# EAGLE board FlightPCB (EAGLE 9.6.2)
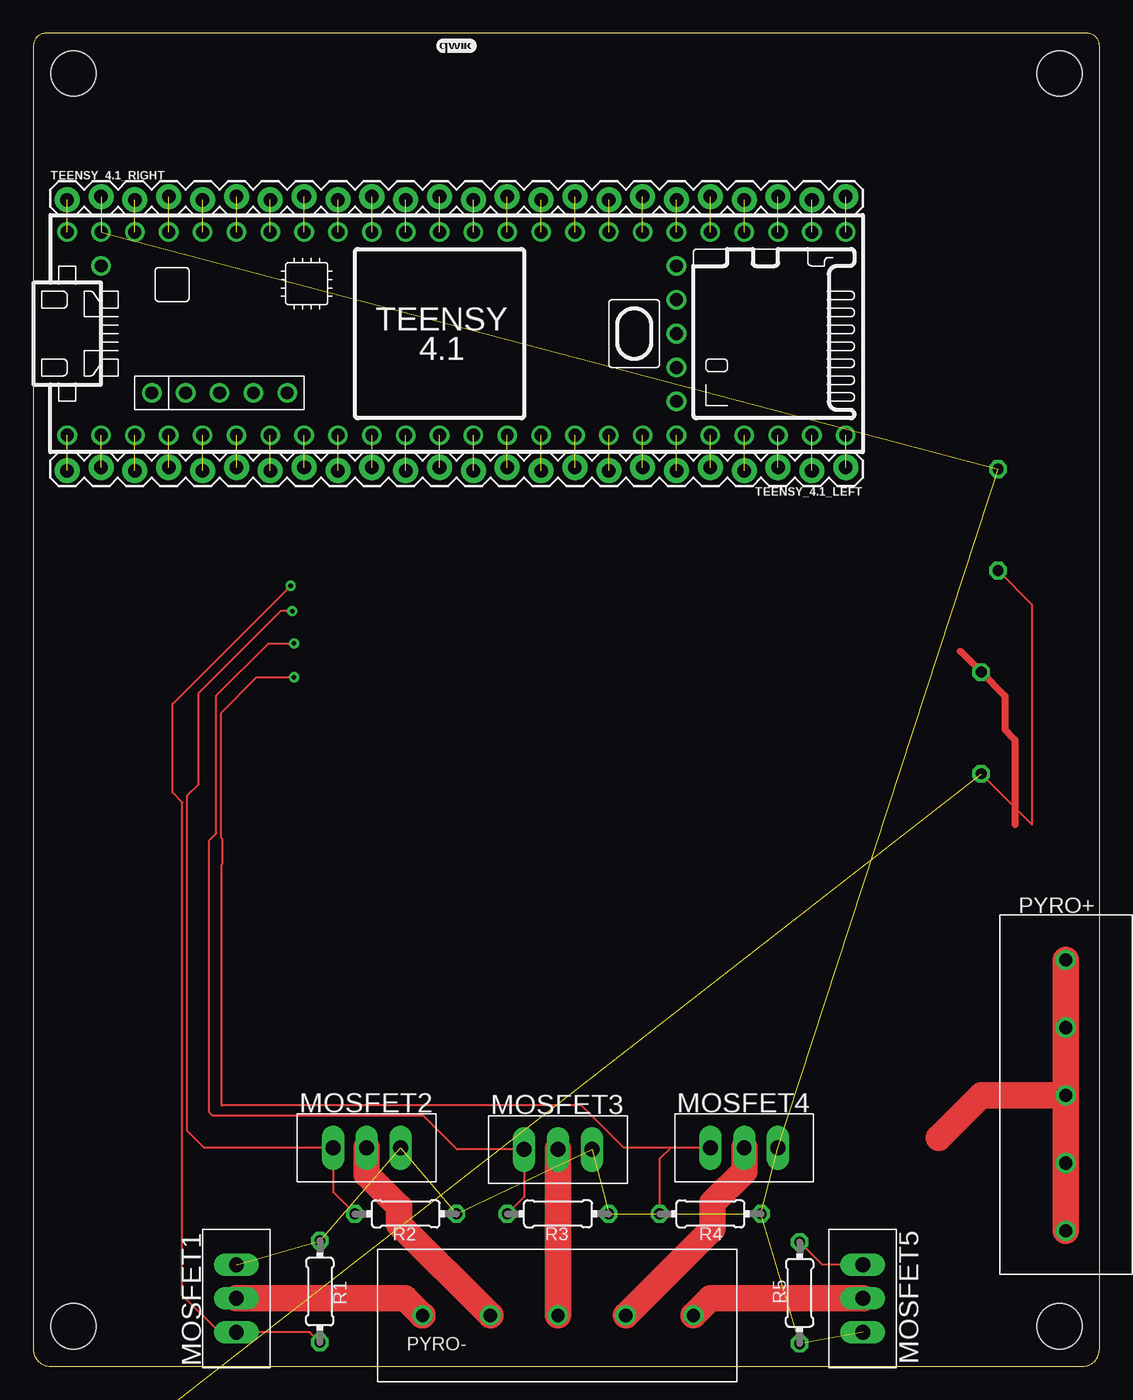
[diagram p0: board, top side]
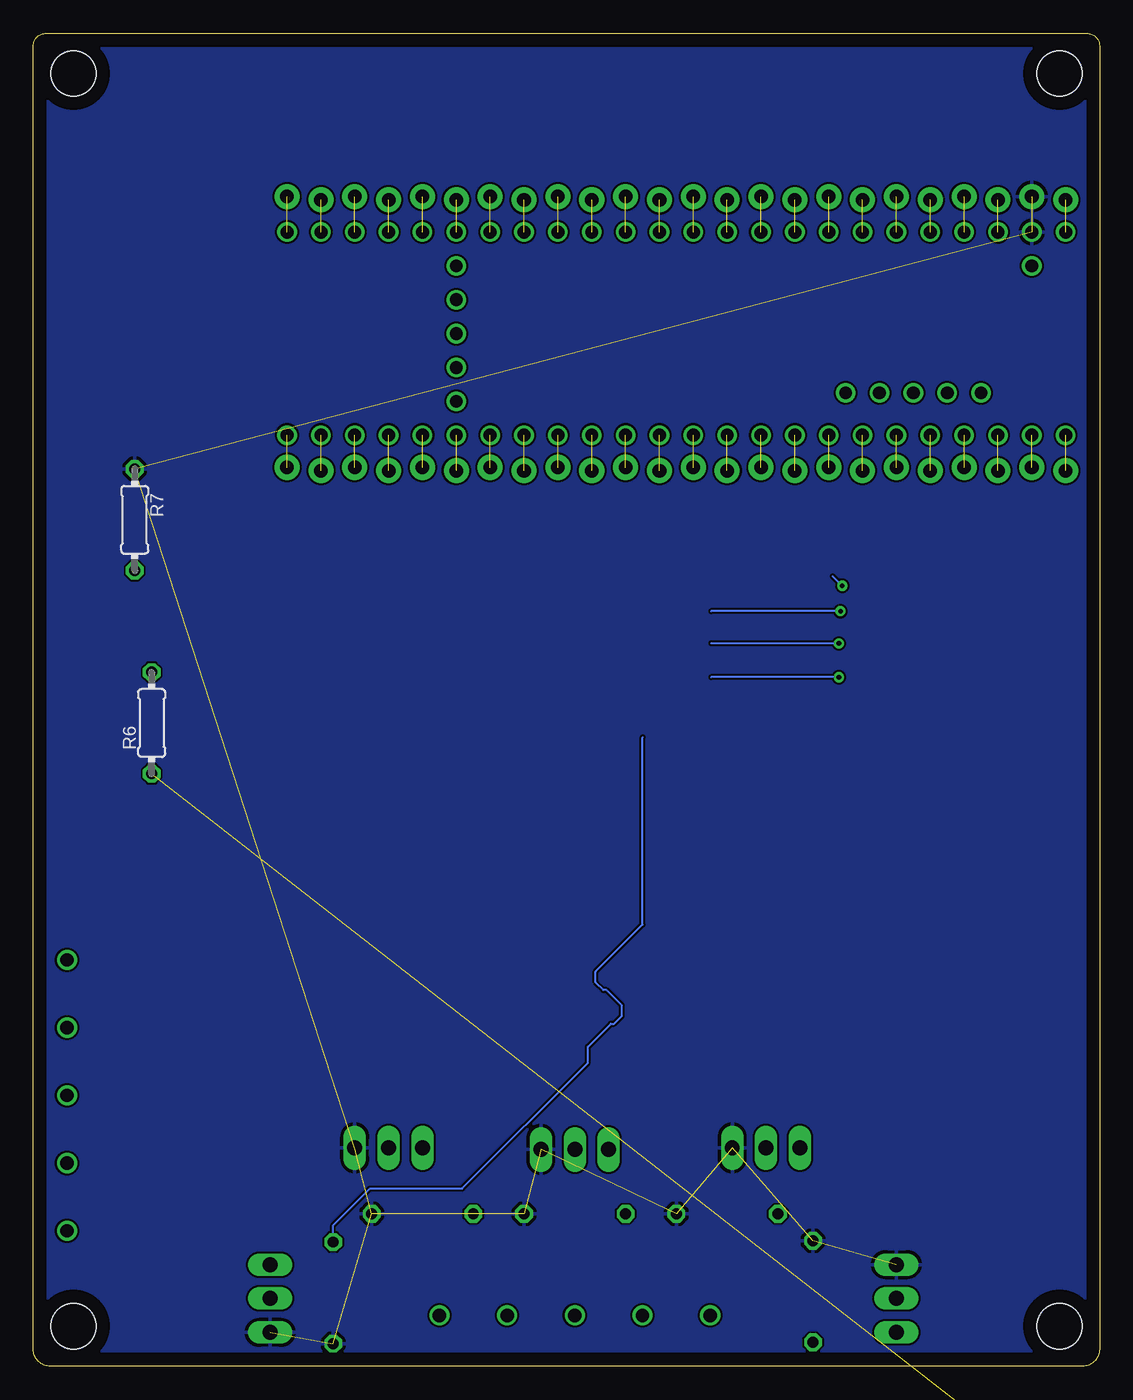
[diagram p1: board, bottom side, seen from below]

Size 80 x 100 mm. Coordinates in mm from the lower left corner, seen from the top.
Outline: 79.06,100 0.94,100 arc90 0,99.06 0,1.27 arc90 1.27,0 78.74,0 arc90 80,1.26 80,99.06 arc90 79.06,100
Copper layers (1+2*15+16): Top 0.035mm / dielectric 0.2mm / Route2 0.0175mm / dielectric 1.065mm / Route15 0.0175mm / dielectric 0.2mm / Bottom 0.035mm
Design rules "default *": minimum track width 6mil, minimum drill 0.35mm, track to track 6mil, track to pad 6mil, pad to pad 6mil, via to via 6mil, smd to smd 6mil, copper to edge 40mil, drill to drill 6mil, minimum pad ring 10mil, minimum via ring 8mil, stop-mask expansion 4mil, vias tented up to drill 0mil, thermal gap 10mil
Net classes: 1 Power Delivery: width 0.25 mm
Holes 3.4 mm at 3,97 3,3 77,97 77,3

## Footprints (pad centres in the part's own frame; a part is rotated, then mirrored left to right if it is on the bottom)
TO220BH_SIMPLE = drill 1.118 long: D 0,-6.35; G -2.54,-6.35; S 2.54,-6.35
TERMINAL_BLOCK_5_PIN_5MM = drill 1: P1 0,0; P2 0,-5.08; P3 0,-10.16; P4 0,-15.24; P5 0,-20.32
0204/7 = drill 0.813 octagon: 1 -3.81,0; 2 3.81,0
TEENSY_4.1 = drill 0.965: 0/RX1/CS1/CRX2* -25.4,-7.62; 1/TX1/MISO1/CTX2* -22.86,-7.62; 2* -20.32,-7.62; 3* -17.78,-7.62; 3V3 7.62,-7.62; 3V3_2 17.78,-2.54; 3V3_250MA -22.86,7.62; 4* -15.24,-7.62; 5* -12.7,-7.62; 6* -10.16,-7.62; 7/RX2* -7.62,-7.62; 8/TX2* -5.08,-7.62; 9* -2.54,-7.62; 10/CS* 0,-7.62; 11/MOSI/CTX1* 2.54,-7.62; 12/MISO* 5.08,-7.62; 13/LED/SCK* 5.08,7.62; 14/A0/TX3* 2.54,7.62; 15/A1/RX3* 0,7.62; 16/A2/RX4/SCL1 -2.54,7.62; 17/A3/TX4/SDA1 -5.08,7.62; 18/A4/SDA* -7.62,7.62; 19/A5/SCL* -10.16,7.62; 20/A6/TX5 -12.7,7.62; 21/A7/RX5 -15.24,7.62; 22/A8/CTX1* -17.78,7.62; 23/A9/CRX1* -20.32,7.62; 24/A10/TX6/SCL2* 10.16,-7.62; 25/A11/RX6/SDA2* 12.7,-7.62; 26/A12/MOSI1 15.24,-7.62; 27/A13/SCK1 17.78,-7.62; 28/RX7* 20.32,-7.62; 29/TX7* 22.86,-7.62; 30/CRX3 25.4,-7.62; 31/CTX3 27.94,-7.62; 32 30.48,-7.62; 33* 30.48,7.62; 34/RX8 27.94,7.62; 35/TX8 25.4,7.62; 36/CS* 22.86,7.62; 37/CS* 20.32,7.62; 38/A14/CS1 17.78,7.62; 39/A15/MISO1 15.24,7.62; 40/A16 12.7,7.62; 41/A17 10.16,7.62; GND -27.94,-7.62; GND2 7.62,7.62; GND3 17.78,0; GND4 -25.4,7.62; PROG 17.78,2.54; RESET 17.78,5.08; U5V -21.59,-4.445; UD+ -16.51,-4.445; UD- -19.05,-4.445; UGND1 -13.97,-4.445; UGND2 -11.43,-4.445; VBAT 17.78,-5.08; VIN -27.94,7.62; VUSB -25.4,5.08
1X24_LOCK = drill 1.016 pad 1.88: 1 -26.67,-0.127; 2 -24.13,0.127; 3 -21.59,-0.127; 4 -19.05,0.127; 5 -16.51,-0.127; 6 -13.97,0.127; 7 -11.43,-0.127; 8 -8.89,0.127; 9 -6.35,-0.127; 10 -3.81,0.127; 11 -1.27,-0.127; 12 1.27,0.127; 13 3.81,-0.127; 14 6.35,0.127; 15 8.89,-0.127; 16 11.43,0.127; 17 13.97,-0.127; 18 16.51,0.127; 19 19.05,-0.127; 20 21.59,0.127; 21 24.13,-0.127; 22 26.67,0.127; 23 29.21,-0.127; 24 31.75,0.127

## Placement (x,y rotation side)
LOGO1  QWIIC_LOGO_3MM  [QWIIC_3MM]  31.75,99.06 0 top
MOSFET1  IRLZ44Z  [TO220BH_SIMPLE]  8.89,5.08 90 top
MOSFET2  IRLZ44Z  [TO220BH_SIMPLE]  25.02,22.73 0 top
MOSFET3  IRLZ44Z  [TO220BH_SIMPLE]  39.37,22.61 0 top
MOSFET4  IRLZ44Z  [TO220BH_SIMPLE]  53.34,22.73 0 top
MOSFET5  IRLZ44Z  [TO220BH_SIMPLE]  68.58,5.08 270 top
PYRO+  [TERMINAL_BLOCK_5_PIN_5MM]  77.47,30.48 0 top
PYRO-  [TERMINAL_BLOCK_5_PIN_5MM]  29.21,3.81 90 top
R1  10k  [0204/7]  21.5,5.6 90 top
R2  10k  [0204/7]  27.94,11.43 0 top
R3  10k  [0204/7]  39.37,11.43 0 top
R4  10k  [0204/7]  50.8,11.43 0 top
R5  10k  [0204/7]  57.5,5.5 270 top
R6  10k  [0204/7]  71.12,48.26 90 bottom
R7  1k  [0204/7]  72.39,63.5 270 bottom
R8  10k  [0204/7]  3.81,-5.08 0 top  (outside the outline)
TEENSY_4.1  TEENSY_4.1  [TEENSY_4.1]  30.48,77.47 0 top
TEENSY_4.1_LEFT  [1X24_LOCK]  34.29,67.31 180 top
TEENSY_4.1_RIGHT  [1X24_LOCK]  29.21,87.63 0 top

## Library data of the parts
LOGO1 = SparkFun-Aesthetics
MOSFET1-MOSFET5 = transistor-power_MOD
PYRO+ PYRO- = MattMtzLPRD
R1-R8 = rcl; SPICEPREFIX: R
TEENSY_4.1 = Teensy4-1
TEENSY_4.1_LEFT TEENSY_4.1_RIGHT = MODIFIED-SparkFun-Connectors

## Nets
+3V3 [Power Delivery]: TEENSY_4.1.3V3 TEENSY_4.1_LEFT.10
+5V: TEENSY_4.1.VIN TEENSY_4.1_RIGHT.1
BATT1_READ_V: R8.1
BATT1_VCC [Power Delivery]: R6.2
CH1: MOSFET1.D PYRO-.P1
CH2: MOSFET2.D PYRO-.P2
CH3: MOSFET3.D PYRO-.P3
CH4: MOSFET4.D PYRO-.P4
CH5: MOSFET5.D PYRO-.P5
GND [Power Delivery]: MOSFET1.S MOSFET2.S MOSFET3.S MOSFET4.S MOSFET5.S R1.2 R2.2 R3.2 R4.2 R5.2 R7.1 TEENSY_4.1.GND4 TEENSY_4.1_RIGHT.2
N$1: TEENSY_4.1.GND TEENSY_4.1_LEFT.24
N$2: TEENSY_4.1.0/RX1/CS1/CRX2* TEENSY_4.1_LEFT.23
N$3: TEENSY_4.1.1/TX1/MISO1/CTX2* TEENSY_4.1_LEFT.22
N$4: R6.1 R7.2 R8.2
N$5: TEENSY_4.1.2* TEENSY_4.1_LEFT.21
N$6: TEENSY_4.1.3* TEENSY_4.1_LEFT.20
N$7: TEENSY_4.1.4* TEENSY_4.1_LEFT.19
N$8: TEENSY_4.1.5* TEENSY_4.1_LEFT.18
N$9: TEENSY_4.1.6* TEENSY_4.1_LEFT.17
N$10: TEENSY_4.1.7/RX2* TEENSY_4.1_LEFT.16
N$11: TEENSY_4.1.8/TX2* TEENSY_4.1_LEFT.15
N$12: TEENSY_4.1.9* TEENSY_4.1_LEFT.14
N$13: TEENSY_4.1.10/CS* TEENSY_4.1_LEFT.13
N$14: TEENSY_4.1.11/MOSI/CTX1* TEENSY_4.1_LEFT.12
N$15: TEENSY_4.1.12/MISO* TEENSY_4.1_LEFT.11
N$17: TEENSY_4.1.24/A10/TX6/SCL2* TEENSY_4.1_LEFT.9
N$18: TEENSY_4.1.25/A11/RX6/SDA2* TEENSY_4.1_LEFT.8
N$19: TEENSY_4.1.26/A12/MOSI1 TEENSY_4.1_LEFT.7
N$20: TEENSY_4.1.27/A13/SCK1 TEENSY_4.1_LEFT.6
N$21: TEENSY_4.1.28/RX7* TEENSY_4.1_LEFT.5
N$22: TEENSY_4.1.29/TX7* TEENSY_4.1_LEFT.4
N$23: TEENSY_4.1.30/CRX3 TEENSY_4.1_LEFT.3
N$24: TEENSY_4.1.31/CTX3 TEENSY_4.1_LEFT.2
N$25: TEENSY_4.1.32 TEENSY_4.1_LEFT.1
N$26: TEENSY_4.1.33* TEENSY_4.1_RIGHT.24
N$27: TEENSY_4.1.34/RX8 TEENSY_4.1_RIGHT.23
N$28: TEENSY_4.1.35/TX8 TEENSY_4.1_RIGHT.22
N$29: TEENSY_4.1.36/CS* TEENSY_4.1_RIGHT.21
N$30: TEENSY_4.1.37/CS* TEENSY_4.1_RIGHT.20
N$31: TEENSY_4.1.38/A14/CS1 TEENSY_4.1_RIGHT.19
N$32: TEENSY_4.1.39/A15/MISO1 TEENSY_4.1_RIGHT.18
N$33: TEENSY_4.1.40/A16 TEENSY_4.1_RIGHT.17
N$34: TEENSY_4.1.41/A17 TEENSY_4.1_RIGHT.16
N$35: TEENSY_4.1.GND2 TEENSY_4.1_RIGHT.15
N$36: TEENSY_4.1.13/LED/SCK* TEENSY_4.1_RIGHT.14
N$37: TEENSY_4.1.14/A0/TX3* TEENSY_4.1_RIGHT.13
N$38: TEENSY_4.1.15/A1/RX3* TEENSY_4.1_RIGHT.12
N$39: TEENSY_4.1.16/A2/RX4/SCL1 TEENSY_4.1_RIGHT.11
N$40: TEENSY_4.1.17/A3/TX4/SDA1 TEENSY_4.1_RIGHT.10
N$41: TEENSY_4.1.18/A4/SDA* TEENSY_4.1_RIGHT.9
N$42: TEENSY_4.1.19/A5/SCL* TEENSY_4.1_RIGHT.8
N$43: TEENSY_4.1.20/A6/TX5 TEENSY_4.1_RIGHT.7
N$44: TEENSY_4.1.21/A7/RX5 TEENSY_4.1_RIGHT.6
N$45: TEENSY_4.1.22/A8/CTX1* TEENSY_4.1_RIGHT.5
N$46: TEENSY_4.1.23/A9/CRX1* TEENSY_4.1_RIGHT.4
PYRO1: MOSFET1.G R1.1
PYRO2: MOSFET2.G R2.1
PYRO3: MOSFET3.G R3.1
PYRO4: MOSFET4.G R4.1
PYRO5: MOSFET5.G R5.1
VCC [Power Delivery]: PYRO+.P1 PYRO+.P2 PYRO+.P3 PYRO+.P4 PYRO+.P5
VCC/2: TEENSY_4.1.3V3_250MA TEENSY_4.1_RIGHT.3

## Tracks (layer width: path | path; a pad name or v marks a point on that pad's centre or on a via)
+3V3  (1 unrouted)
+5V  (1 unrouted)
BATT1_VCC
  Top 0.508: 73.66,40.64 73.66,46.99 72.9,47.75 72.9,50.29 R6.2 69.54,53.65
CH1
  Top 2: PYRO-.P1 29.16,3.81 27.89,5.08 MOSFET1.D
CH2
  Top 2: PYRO-.P2 27.45,10.65 27.45,11.95 25.02,14.38 MOSFET2.D
CH3
  Top 2: MOSFET3.D PYRO-.P3
CH4
  Top 2: MOSFET4.D 53.34,14.63 50.95,12.25 50.95,10.31 PYRO-.P4
CH5
  Top 2: MOSFET5.D 50.8,5.08 PYRO-.P5
GND  (12 unrouted)
  pour Bottom: -1.27,101.6 81.28,101.6 81.28,-1.27 -1.27,-1.27
N$1  (1 unrouted)
N$2  (1 unrouted)
N$3  (1 unrouted)
N$4  (1 unrouted)
  Top 0.152: R6.1 74.93,40.64 74.93,57.15 R7.2
N$5  (1 unrouted)
N$6  (1 unrouted)
N$7  (1 unrouted)
N$8  (1 unrouted)
N$9  (1 unrouted)
N$10  (1 unrouted)
N$11  (1 unrouted)
N$12  (1 unrouted)
N$13  (1 unrouted)
N$14  (1 unrouted)
N$15  (1 unrouted)
N$17  (1 unrouted)
N$18  (1 unrouted)
N$19  (1 unrouted)
N$20  (1 unrouted)
N$21  (1 unrouted)
N$22  (1 unrouted)
N$23  (1 unrouted)
N$24  (1 unrouted)
N$25  (1 unrouted)
N$26  (1 unrouted)
N$27  (1 unrouted)
N$28  (1 unrouted)
N$29  (1 unrouted)
N$30  (1 unrouted)
N$31  (1 unrouted)
N$32  (1 unrouted)
N$33  (1 unrouted)
N$34  (1 unrouted)
N$35  (1 unrouted)
N$36  (1 unrouted)
N$37  (1 unrouted)
N$38  (1 unrouted)
N$39  (1 unrouted)
N$40  (1 unrouted)
N$41  (1 unrouted)
N$42  (1 unrouted)
N$43  (1 unrouted)
N$44  (1 unrouted)
N$45  (1 unrouted)
N$46  (1 unrouted)
PYRO1  (via drill 0.35)
  Top 0.152: R1.1 20.74,2.55 15.25,2.55 MOSFET1.G 13.97,2.54 11.18,5.33 11.18,42.3 10.45,43.03 10.45,49.69 v19.3,58.55
  Bottom 0.152: v19.3,58.55 20.01,59.25
PYRO2  (via drill 0.35)
  Top 0.152: R2.1 22.48,13.08 MOSFET2.G 12.83,16.38 11.56,17.65 11.56,42.81 12.41,43.66 12.41,50.51 18.54,56.64 v19.43,56.64
  Bottom 0.152: v19.43,56.64 29.14,56.64
PYRO3  (via drill 0.35)
  Top 0.152: R3.1 36.83,12.7 MOSFET3.G 31.81,16.26 29.27,18.8 13.46,18.8 13.21,19.05 13.21,39.45 13.73,39.98 13.73,50.31 17.65,54.23 v19.56,54.23
  Bottom 0.152: v19.56,54.23 29.15,54.23
PYRO4  (via drill 0.35)
  Top 0.152: R4.1 46.99,15.54 47.83,16.38 MOSFET4.G 44.32,16.38 41.15,19.56 14.15,19.56 14.15,37.64 14.19,37.69 14.19,39.52 14.1,39.62 14.1,49.02 16.76,51.69 v19.56,51.69
  Bottom 0.152: v19.56,51.69 29.15,51.69
PYRO5
  Top 0.152: MOSFET5.G 59.19,7.62 R5.1
  Bottom 0.152: R5.1 57.5,10.58 54.74,13.34 47.82,13.34 38.39,22.77 38.39,23.96 36.66,25.69 36.42,25.69 35.85,26.26 35.85,27.08 37,28.23 37.24,28.23 37.81,28.8 37.81,29.62 34.29,33.14 34.29,47.17
VCC
  Top 2: PYRO+.P3 71.12,20.32 67.94,17.14 | 67.94,17.14 | PYRO+.P1 PYRO+.P2 PYRO+.P3 | PYRO+.P3 PYRO+.P4 PYRO+.P5
VCC/2  (1 unrouted)

## Text on the board
tPlace: LPRD Flight Computer / Updated 9/20/2020 / by Matt Martinez / CALIPSO V2.0